# Altium PCB PCB1.PcbDoc
Units mil, origin at the board's own origin, x right, y up, seen from the top; angles counter-clockwise.
Board outline 4000 x 4000 mil, 4 copper layers (Top Layer, Internal Plane 1, Internal Plane 2, Bottom Layer), stack 18.2 mil thick; 26 components, 23 nets, 70 pads, 0 vias.
Unrouted connection lines stored in the file: 12.
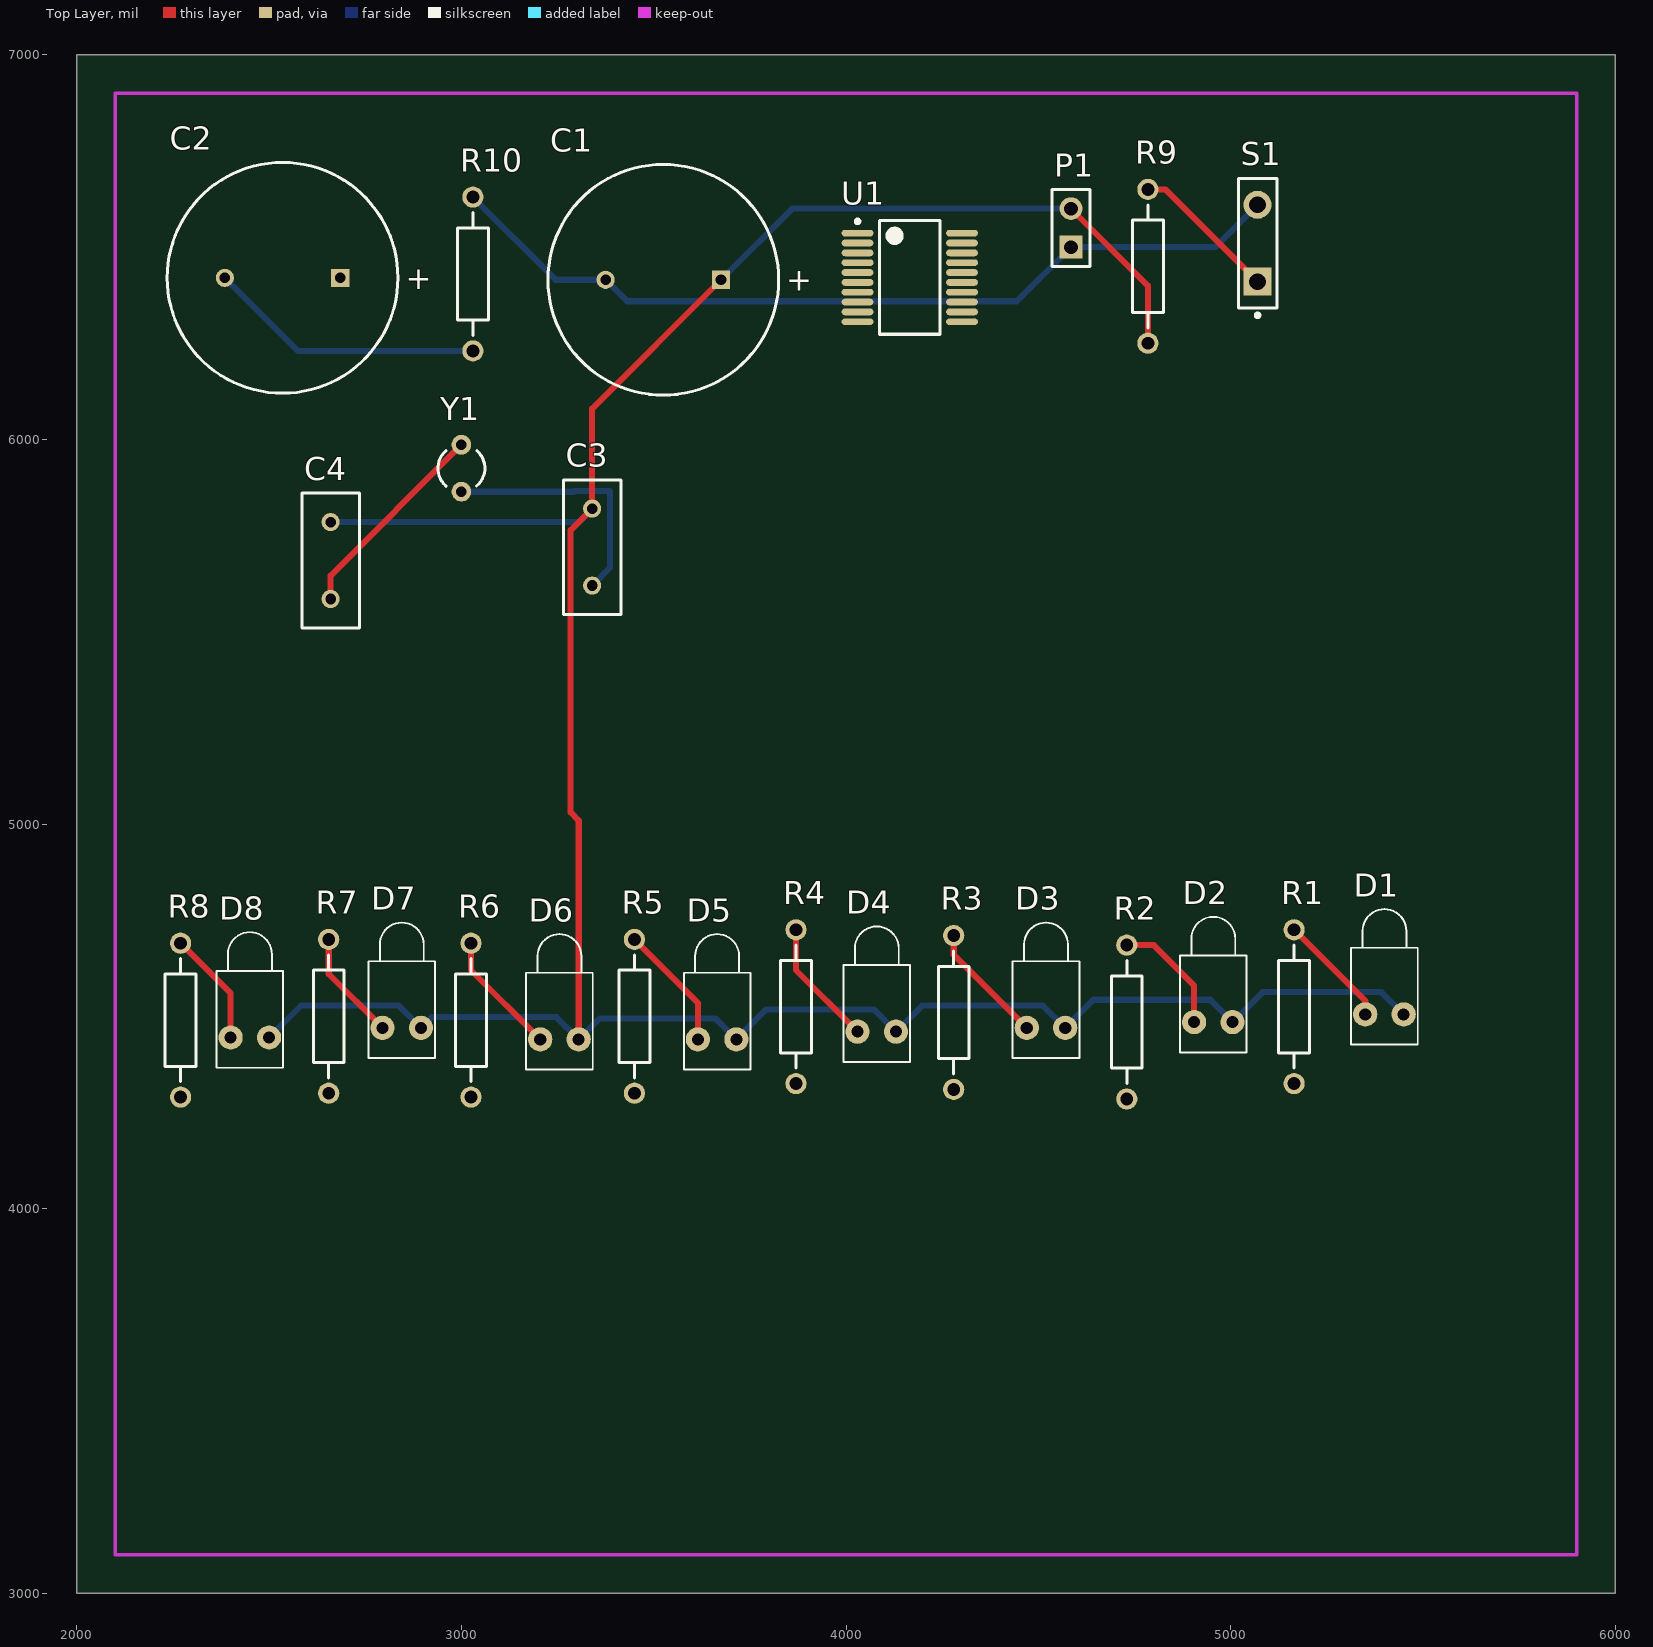
[diagram p0: Top Layer view]
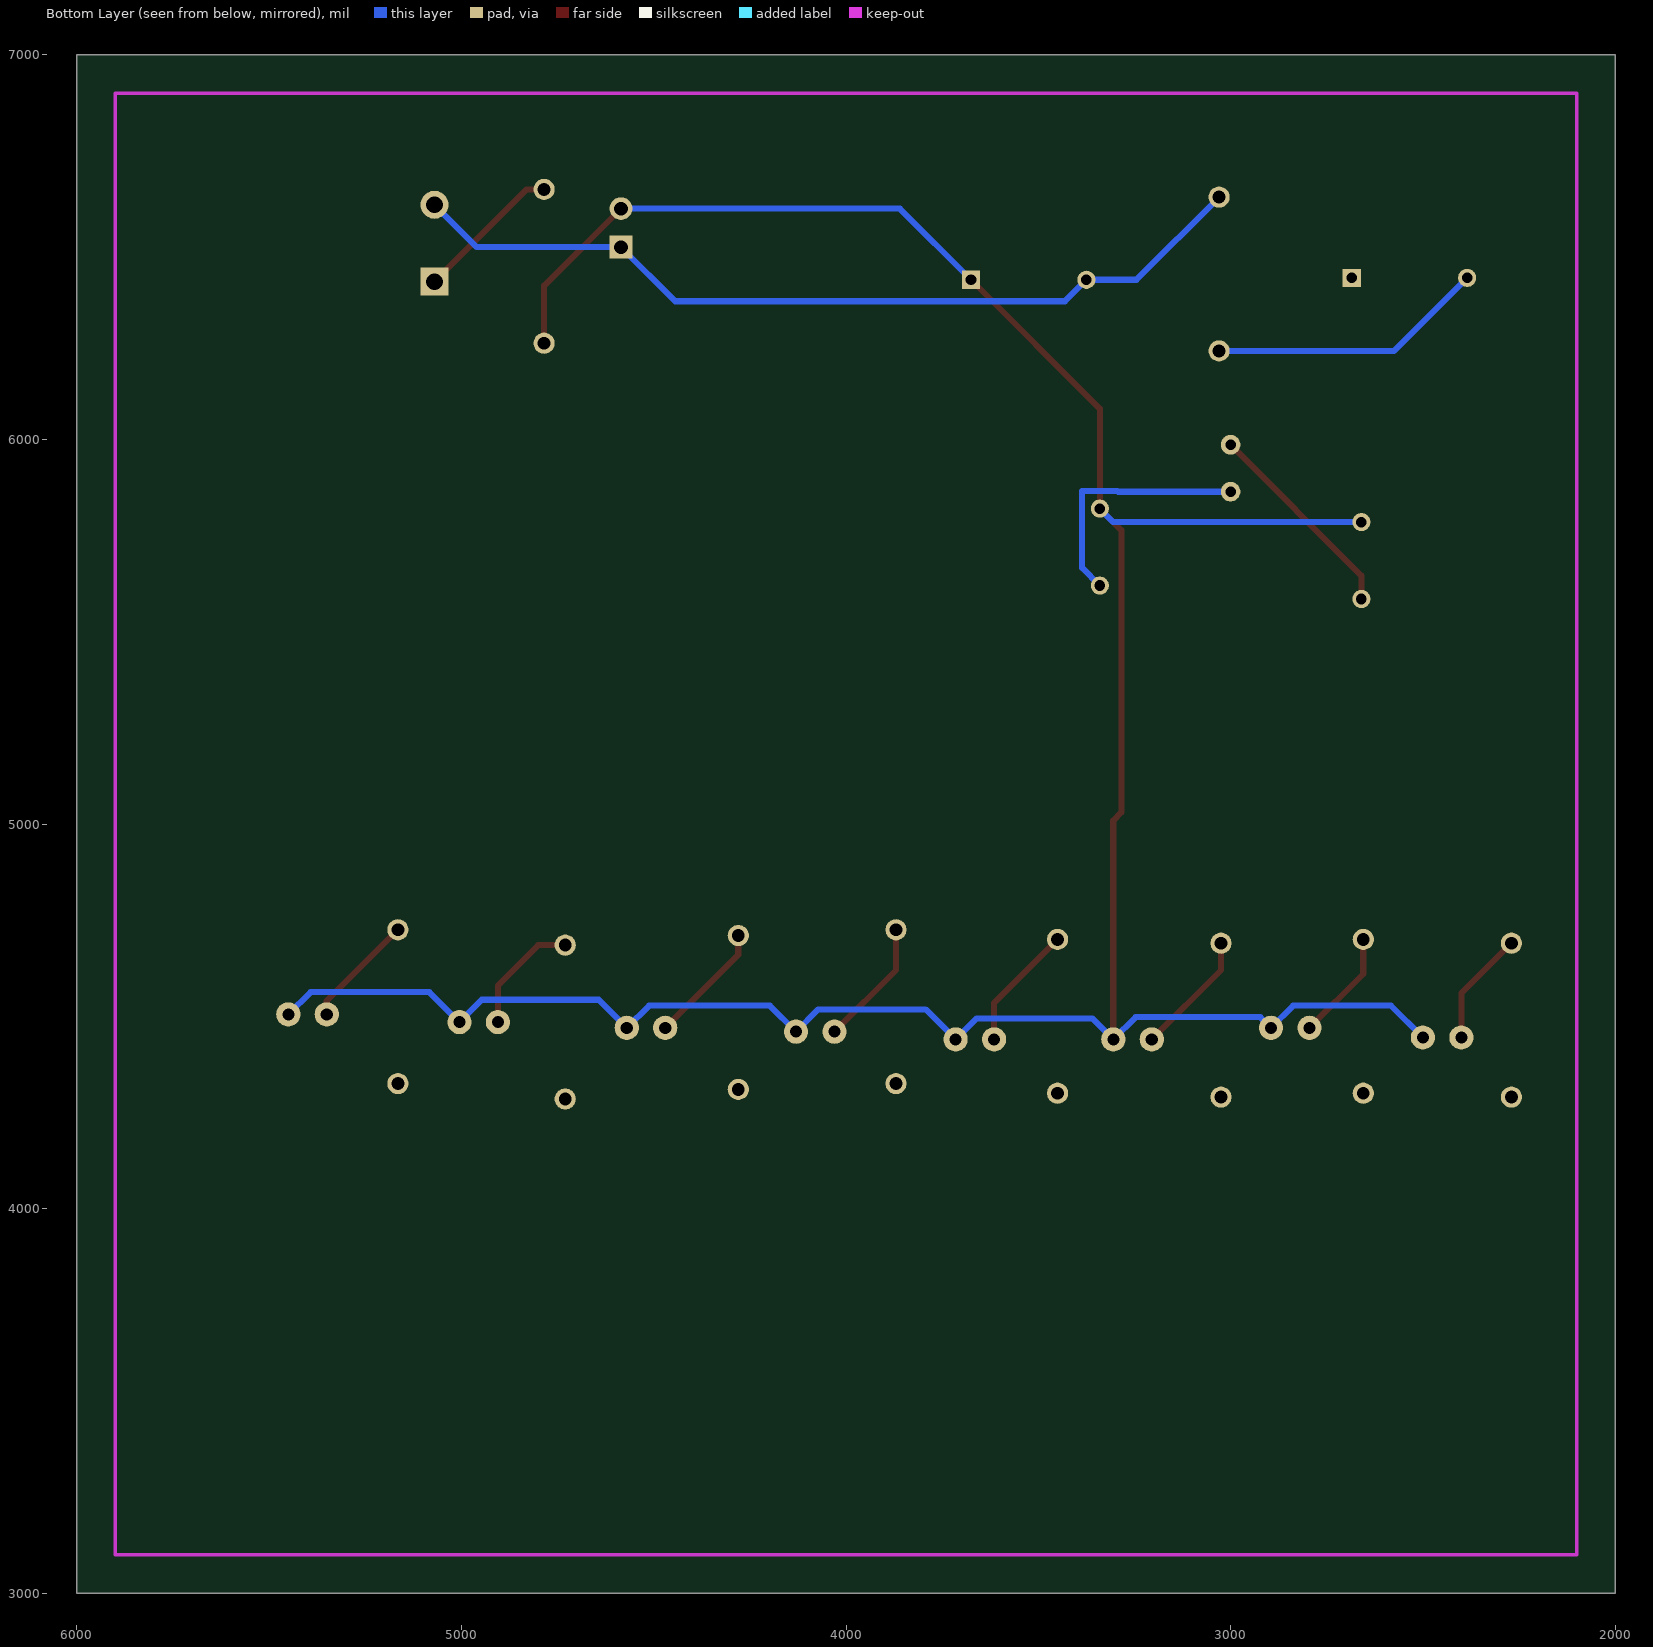
[diagram p1: Bottom Layer view, seen from below]
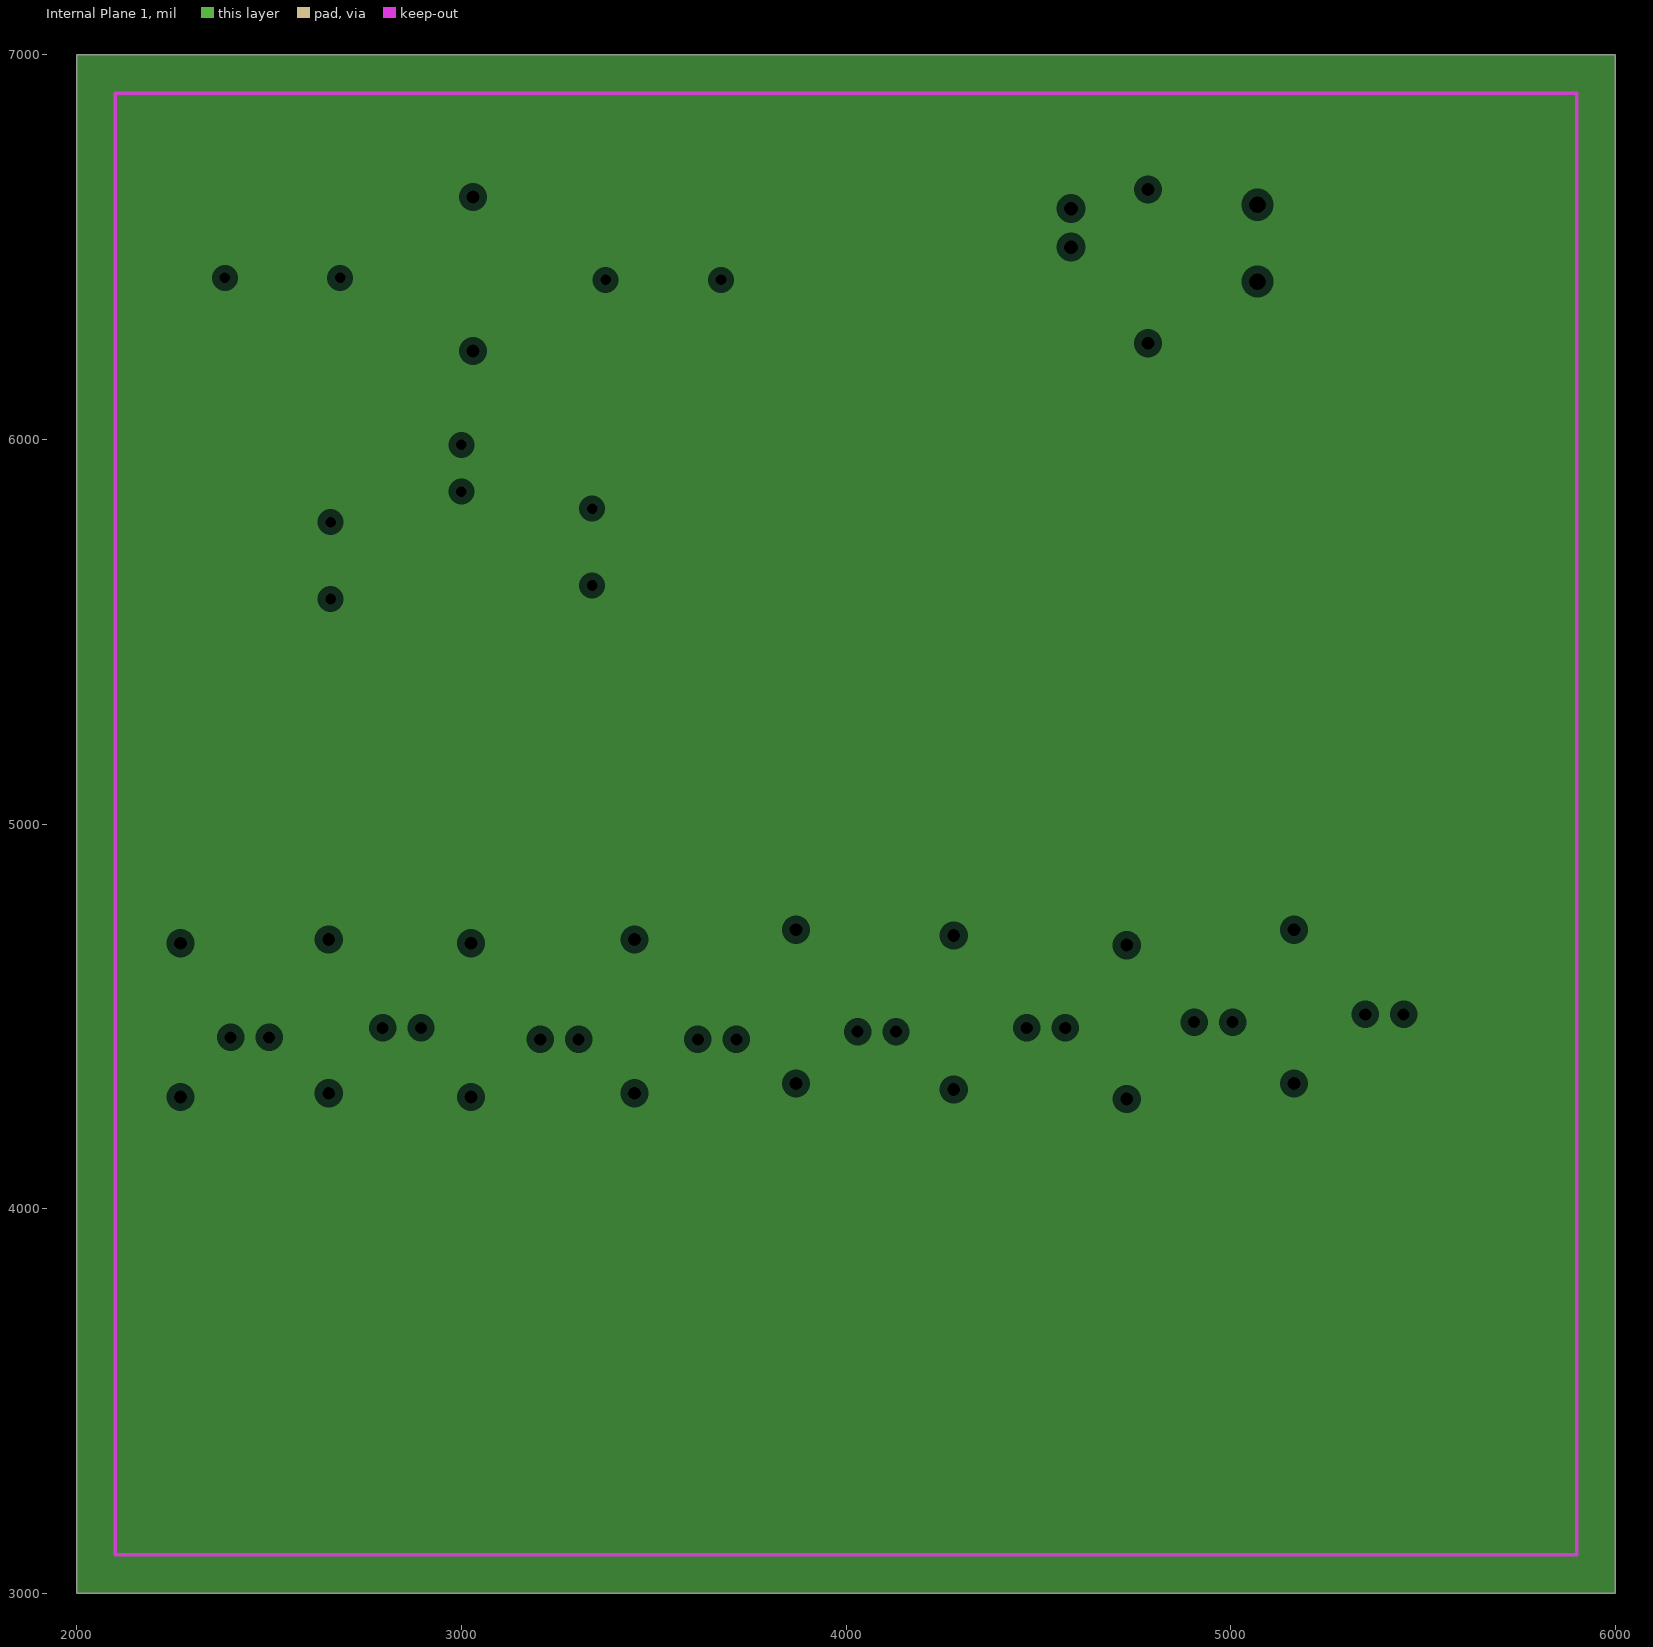
[diagram p2: Internal Plane 1, clearances drawn from the general rule]
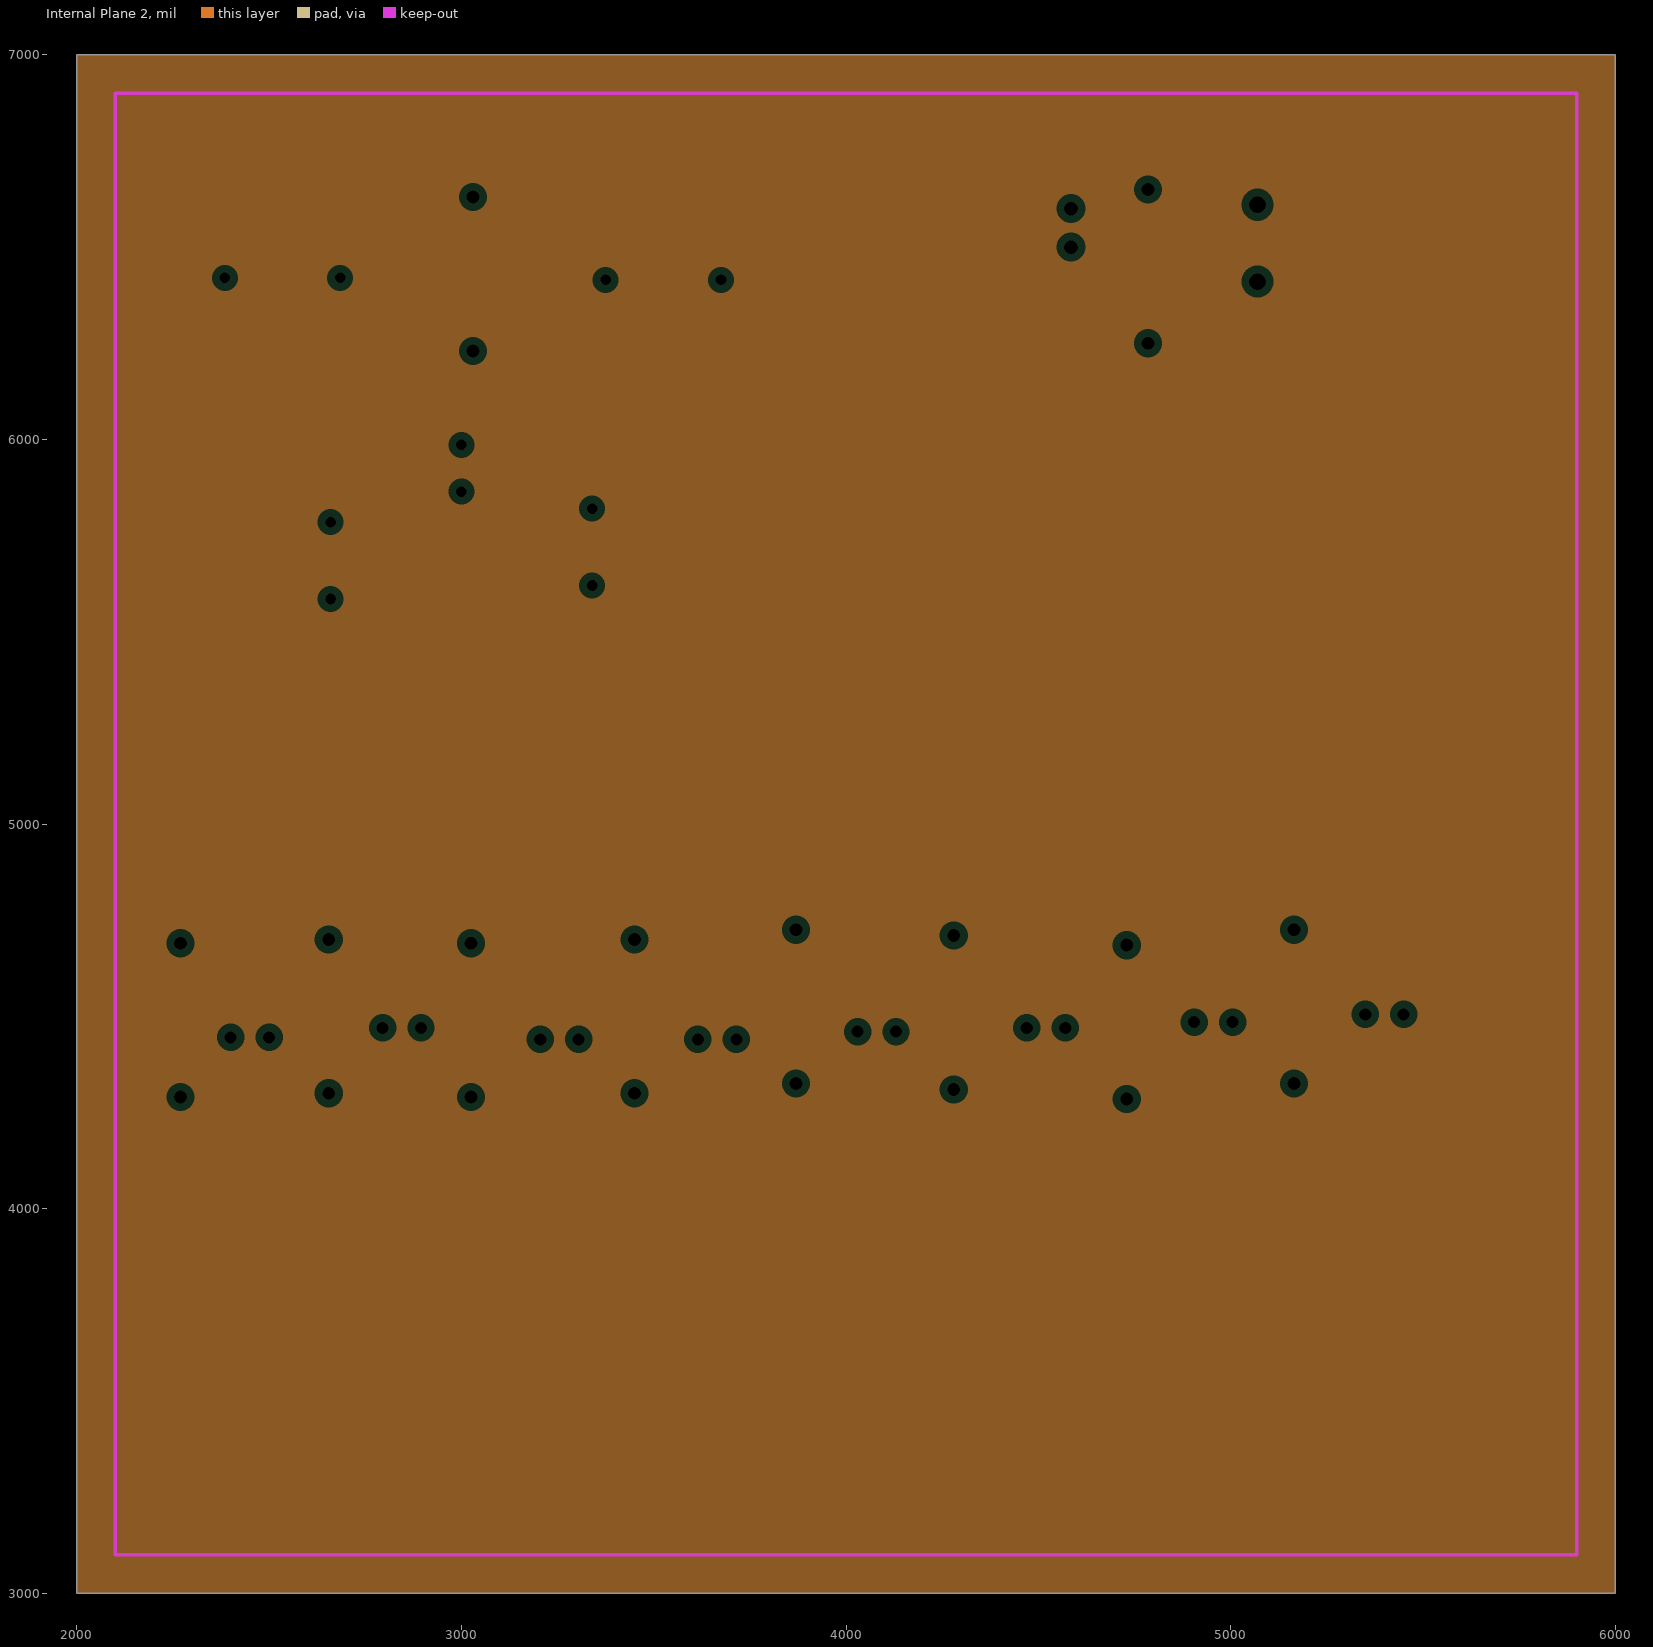
[diagram p3: Internal Plane 2, clearances drawn from the general rule]

## Layer stack, top to bottom
Top Solder: solder mask 0.4, Solder Resist, Dk 3.5
Top Layer: signal copper 1.4
Internal Plane 1: plane copper 1.4
Internal Plane 2: plane copper 1.4
Dielectric 1: dielectric 12.6, FR-4, Dk 4.8
Bottom Layer: signal copper 1.4
Bottom Solder: solder mask 0.4, Solder Resist, Dk 3.5

## Board outline
2000,3000 6000,3000 6000,7000 2000,7000

## Design rules (kind name [scope] priority, off if disabled: settings)
Clearance [All] p1: gap=14 ignorepadtopadclearanceinfootprint=FALSE
PlaneClearance [All] p1: clearance=20
PlaneConnect [All] p1: planeconnectstyle=Relief reliefexpansion=20 reliefentries=4 reliefconductorwidth=10 reliefairgap=10
PolygonConnect [All] p1: connectstyle=Relief reliefconductorwidth=10 reliefentries=4 polygonreliefangle="90 Angle" airgapwidth=10
RoomDefinition Designator_2 [InComponentClass('Designator')] p1: confinementstyle=ConfineIn formatcopy=TRUE lockcomponents=FALSE outline 6045,4220 8580,4220 8580,4940 6045,4940
RoomDefinition Designator_1 [InComponentClass('Designator')] p2: confinementstyle=ConfineIn formatcopy=TRUE lockcomponents=FALSE outline 6045,4220 8580,4220 8580,4940 6045,4940
RoomDefinition Designator [InComponentClass('Designator')] p3: confinementstyle=ConfineIn formatcopy=TRUE lockcomponents=FALSE outline 6045,4220 8580,4220 8580,4940 6045,4940
RoutingVias [All] p1: holewidth=32 width=80 viastyle="Through Hole" minholewidth=28 minwidth=50 maxholewidth=28 maxwidth=50
SolderMaskExpansion [All] p1: expansion=4
Width [All] p1: maxlimit=16 minlimit=16 preferedwidth=16
28 further rules are at their usual default settings.

## Classes and differential pairs
component class Designator: C1 C2 P1 R9 R10 S1 U1

## Components (designator, comment, footprint, x,y, rotation, side; value= is the part's Value field where it differs from the comment)
C1 "Cap Pol1" RB7.6-15 3525,6415 r0 top value=10uF
C2 "Cap Pol1" RB7.6-15 2535,6420 r0 top value=1uF
C3 "Cap" RAD-0.2 3340,5720 r90 top value=15pF
C4 "Cap" RAD-0.2 2660,5685 r90 top value=15pF
D1 "LED1" LED-1 5400,4505 r90 top
D2 "LED1" LED-1 4955,4485 r90 top
D3 "LED1" LED-1 4520,4470 r90 top
D4 "LED1" LED-1 4080,4460 r90 top
D5 "LED1" LED-1 3665,4440 r90 top
D6 "LED1" LED-1 3255,4440 r90 top
D7 "LED1" LED-1 2845,4470 r90 top
D8 "LED1" LED-1 2450,4445 r90 top
P1 "Header 2" HDR1X2 4585,6500 r90 top
R1 "Res2" AXIAL-0.4 5165,4525 r90 top value=470
R2 "Res2" AXIAL-0.4 4730,4485 r90 top value=470
R3 "Res2" AXIAL-0.4 4280,4510 r90 top value=470
R4 "Res2" AXIAL-0.4 3870,4525 r90 top value=470
R5 "Res2" AXIAL-0.4 3450,4500 r90 top value=470
R6 "Res2" AXIAL-0.4 3025,4490 r90 top value=470
R7 "Res2" AXIAL-0.4 2655,4500 r90 top value=470
R8 "Res2" AXIAL-0.4 2270,4490 r90 top value=470
R9 "Res2" AXIAL-0.4 4785,6450 r90 top value=1K
R10 "Res2" AXIAL-0.4 3030,6430 r90 top value=1K
S1 "SW-SPST" SPST-2 5070,6510 r90 top
U1 "PIC16F84A-20I/SS" SSOP-SS20_N 4165.83,6421.02 r0 top
Y1 "XTAL" R38 3000,5925 r0 top

## Footprints (in the part's own frame and the unit in brackets; to place one, negate y for a bottom-side part, rotate by r counter-clockwise, add the part's x,y. Pads: shape width x height; smd on the part's side, far side on the other; paste and mask are expansions set on the pad)
AXIAL-0.4 [mm] "Axial Device, Thru-Hole; 2 Leads; 0.4 in Pin Spacing"
  round 1.4 hole 0.85: 1(-5.08,0) 2(5.08,0)
  silkscreen extent -4.06,-1.02 4.06,1.02
HDR1X2 [mm] "Connector; Header; 2 Position"
  rect 1.5x1.5 hole 0.9: 1(0,0)
  round 1.5 hole 0.9: 2(2.54,0)
  silkscreen extent -1.27,-1.27 3.81,1.27
LED-1 [mm] "LED; 2 Leads"
  round 1.6 hole 0.8: 1(0,1.27) 2(0,-1.27)
  silkscreen extent -2,-2.2 6.95,2.2
R38 [mm] "Crystal, Thru-Hole; 2 Leads; Body 3.1 x 8.2 mm (Dia.xH)"
  round 1.3 hole 0.7: 1(0,1.55) 2(0,-1.55)
  silkscreen extent -1.55,-1.19 1.55,1.17
RAD-0.2 [mm] "Radial Cap, Thru-Hole; 2 Leads; 0.2 in Pin Spacing"
  round 1.2 hole 0.7: 1(-2.54,0) 2(2.54,0)
  silkscreen extent -4.44,-1.91 4.44,1.91
RB7.6-15 [mm] "Polarized Capacitor (Radial); 2 Leads"
  rect 1.2x1.2 hole 0.7: 1(3.81,0)
  round 1.2 hole 0.7: 2(-3.81,0)
  silkscreen extent -7.62,-7.62 7.62,7.62
SPST-2 [mm] "Switch; 2 Leads"
  rect 1.85x1.85 hole 1.1: 1(-2.54,0)
  round 1.85 hole 1.1: 2(2.54,0)
  silkscreen extent -4.89,-1.27 4.28,1.27
SSOP-SS20_N [mm] "SOP, 20-Leads, Body 7.2x5.2mm, Pitch 0.65mm, IPC Medium Density"
  oval 2.1x0.45 smd: 1(-3.45,2.925) 2(-3.45,2.275) 3(-3.45,1.625) 4(-3.45,0.975) 5(-3.45,0.325) 6(-3.45,-0.325) 7(-3.45,-0.975) 8(-3.45,-1.625) 9(-3.45,-2.275) 10(-3.45,-2.925) 11(3.45,-2.925) 12(3.45,-2.275) 13(3.45,-1.625) 14(3.45,-0.975) 15(3.45,-0.325) 16(3.45,0.325) 17(3.45,0.975) 18(3.45,1.625) 19(3.45,2.275) 20(3.45,2.925)
  silkscreen extent -3.57,-3.75 2,3.82, body extent -2.7,-3.75 2.7,3.75, height 2

## Part data
C1 C2: "Polarized Capacitor (Radial)", LatestRevisionDate=17-Jul-2002, LatestRevisionNote="Re-released for DXP Platform.", PackageDescription="Polarized Capacitor (Radial); 2 Leads", PackageReference=RB7.6-15, Published=8-Jun-2000, Publisher="Altium Limited"
C3 C4: "Capacitor", LatestRevisionDate=17-Jul-2002, LatestRevisionNote="Re-released for DXP Platform.", PackageDescription="Radial Cap, Thru-Hole; 2 Leads; 0.3 in Pin Spacing", PackageReference=RAD-0.3, Published=8-Jun-2000, Publisher="Altium Limited"
D1 D2 D3 D4 D5 D6 D7 D8: "Typical RED GaAs LED", LatestRevisionDate=08-Jul-2005, LatestRevisionNote="Mech Layer 1 removed.", PackageDescription="LED; 2 Leads", PackageReference=LED-1, Published=8-Jun-2000, Publisher="Altium Limited"
P1: "Header, 2-Pin", LatestRevisionDate=17-Jul-2002, LatestRevisionNote="Re-released for DXP Platform.", Publisher="Altium Limited"
R1 R2 R3 R4 R5 R6 R7 R8 R9 R10: "Resistor", LatestRevisionDate=17-Jul-2002, LatestRevisionNote="Re-released for DXP Platform.", PackageDescription="Axial Device, Thru-Hole; 2 Leads; 0.4 in Pin Spacing", PackageReference=AXIAL-0.4, Published=8-Jun-2000, Publisher="Altium Limited"
S1: "Single-Pole, Single-Throw Switch", LatestRevisionDate=17-Jul-2002, LatestRevisionNote="Re-released for DXP Platform.", PackageDescription="Switch; 2 Leads", PackageReference=SPST-2, Published=24-Mar-1999, Publisher="Altium Limited"
U1: "Enhanced FLASH/EEPROM 8-Bit Microcontroller, 1K (x14-Bit words) FLASH, 68 Bytes RAM, 20 MHz, 20-Pin SSOP, Standard VDD Range, Industrial Temperature", Supplier Part Number 1=PIC16F84A-20I/SS-ND, Code_IPC=SOP65P780-20, Code_JEDEC=MO-150, ComponentLink1Description=Datasheet, ComponentLink1URL=http://ww1.microchip.com/downloads/en/DeviceDoc/35007b.pdf, ComponentLink2Description="Packaging Specification", ComponentLink2URL=http://www.microchip.com/stellent/groups/techpub_sg/documents/packagingspec/en012702.pdf, ComponentLink3Description="Microchip.com Home", ComponentLink3URL=http://www.microchip.com/, DatasheetVersion="revB, Aug-2001", LatestRevisionDate=29-Jan-2009, LatestRevisionNote="Sch. layout revised. 3D Model Removed.", PackageDescription="20-Lead Plastic Shrink Small Outline (SS) - 5.3mm Body [SSOP]", PackageReference=SSOP-SS20, PackageVersion="revBB, Aug-2009", Published=11-Oct-2004, Publisher="Altium Limited", Supplier 1=Digi-Key, Supplier 2=Farnell, Supplier Part Number 2=1084268
Y1: "Crystal Oscillator", LatestRevisionDate=17-Jul-2002, LatestRevisionNote="Re-released for DXP Platform.", PackageDescription="Crystal, Thru-Hole; 2 Leads; Body 3.1 x 8.2 mm (Dia.xH)", PackageReference=R38, Published=8-Jun-2000, Publisher="Altium Limited"

## Nets (pads, with @x,y where several pads share a name; then routed paths per layer and width w, separated by ;. In a path a pad name is that pad's centre, name@x,y a point inside that pad or via, vN(x,y) a via of type N, cw(c..) or ccw(c..) an arc to the next point about the centre after c; other vN are vias at no path point)
GND: C1.1 C3.2 C4.2 D1.2 D2.2 D3.2 D4.2 D5.2 D6.2 D7.2 D8.2 P1.2 R9.1 | length 7567.5
  Top Layer w16: D6.2 3305,5009 3284,5030 3284,5764 C3.2 3340,6080 C1.1 ; P1.2 4785,6400 R9.1
  Bottom Layer w16: D8.2 2583,4528 2837,4528 D7.2 2923,4498 3247,4498 D6.2 3359,4494 3661,4494 D5.2 3793,4518 4072,4518 D4.2 4198,4528 4512,4528 D3.2 4643,4543 4947,4543 D2.2 5083,4563 5392,4563 D1.2 ; C4.2 3305,5785 C3.2 ; C1.1 3860,6600 P1.2
NetC1_2: C1.2 P1.1 R10.2 S1.2 | length 2256.2
  Bottom Layer w16: R10.2 3245,6415 C1.2 3431,6359 4444,6359 P1.1 4960,6500 S1.2
NetC2_1: C2.1 U1.4
NetC2_2: C2.2 R10.1 | length 723.7
  Bottom Layer w16: C2.2 2575,6230 R10.1
NetC3_1: C3.1 U1.18 Y1.2 | length 651.9
  Bottom Layer w16: Y1.2 3291.98,5863.98 3294,5866 3386,5866 3386,5666 C3.1
NetC4_1: C4.1 U1.17 Y1.1 | length 541.9
  Top Layer w16: C4.1 2660,5646.02 Y1.1
NetD1_1: D1.1 R1.2 | length 296.6
  Top Layer w16: R1.2 5350,4540 D1.1
NetD2_1: D2.1 R2.2 | length 313.5
  Top Layer w16: R2.2 4800,4685 4905,4580 D2.1
NetD3_1: D3.1 R3.2 | length 318.7
  Top Layer w16: R3.2 4280,4660 D3.1
NetD4_1: D4.1 R4.2 | length 331.3
  Top Layer w16: R4.2 3870,4620 D4.1
NetD5_1: D5.1 R5.2 | length 328.3
  Top Layer w16: R5.2 3615,4535 D5.1
NetD6_1: D6.1 R6.2 | length 324.6
  Top Layer w16: R6.2 3025,4620 D6.1
NetD7_1: D7.1 R7.2 | length 288
  Top Layer w16: R7.2 2655,4610 D7.1
NetD8_1: D8.1 R8.2 | length 298.8
  Top Layer w16: R8.2 2400,4560 D8.1
NetR1_1: R1.1 U1.7
NetR2_1: R2.1 U1.8
NetR3_1: R3.1 U1.9
NetR4_1: R4.1 U1.10
NetR5_1: R5.1 U1.11
NetR6_1: R6.1 U1.12
NetR7_1: R7.1 U1.13
NetR8_1: R8.1 U1.14
NetR9_2: R9.2 S1.1 U1.19 | length 384.4
  Top Layer w16: R9.2 4830,6650 S1.1
pads on no net: U1.1 U1.2 U1.3 U1.5 U1.6 U1.15 U1.16 U1.20

## Keep-outs
Keep-Out Layer:
  lines w10: 2100,3100 2100,6900 5900,6900 5900,3100 2100,3100

## Silkscreen, mask and mechanical layers (free items; w line width, h text height)
Drill Drawing:
  text ".LEGEND" at 3375,3990 h60
  text "Drill Drawing." at 3535,3855 h60

## Dimensions
2100,3100 to 2100,6900 on Mechanical 1
2100,3100 to 5900,3100 on Mechanical 1

## Text inside footprints (layer, text, board x,y; h text height)
C1: Top Overlay "+" at 3845.15,6385.99 h59.06
C2: Top Overlay "+" at 2855.15,6390.99 h59.06